# Altium PCB CH340K6T-R0.PcbDoc
Units mil, origin at the board's own origin, x right, y up, seen from the top; angles counter-clockwise.
Board outline 614 x 923 mil, 2 copper layers (Top Layer, Bottom Layer); 11 components, 14 nets, 44 pads, 50 vias.
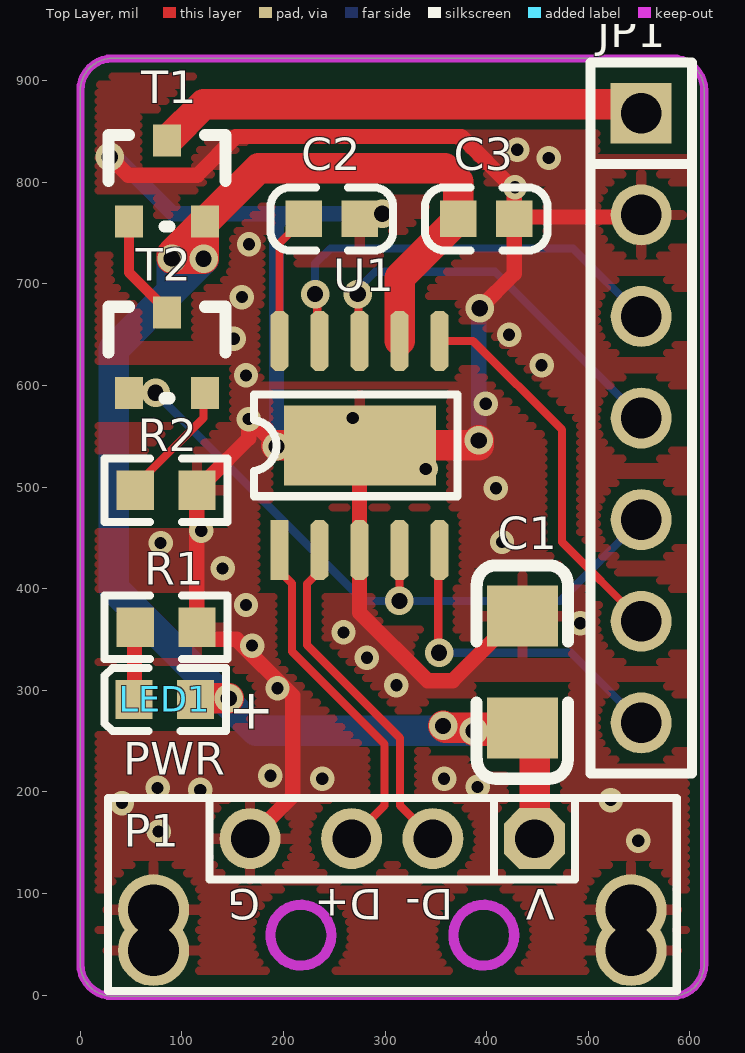
[diagram p0: Top Layer view]
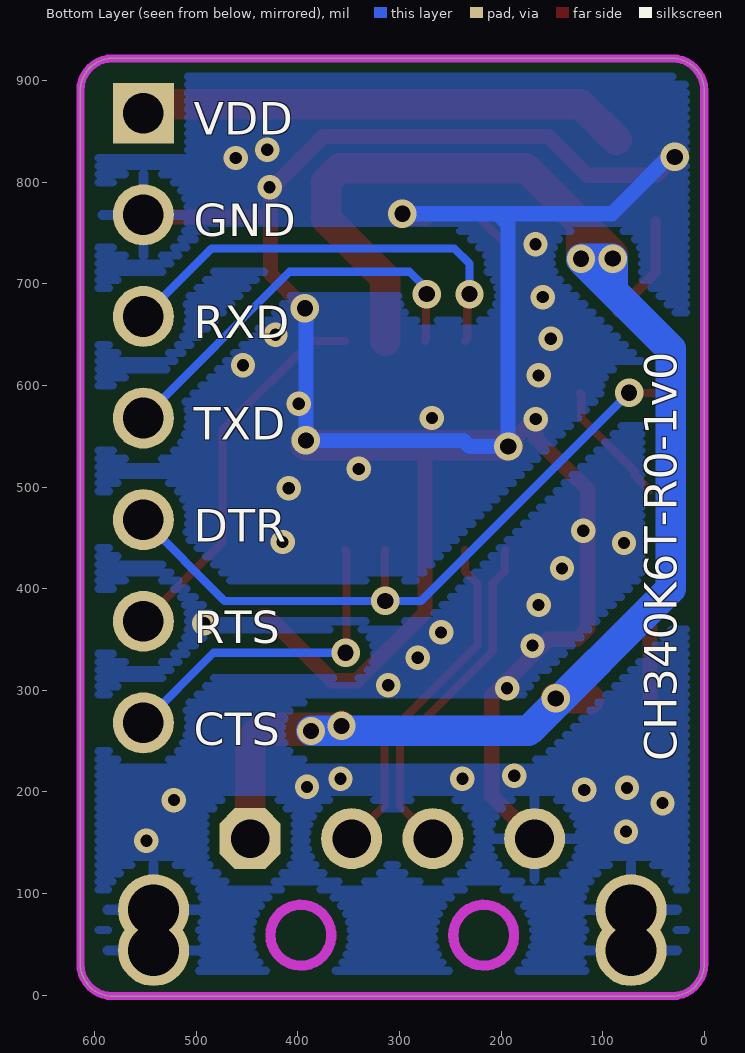
[diagram p1: Bottom Layer view, seen from below]

## Layer stack, top to bottom
Top Solder: solder mask 0.4, Solder Resist, Dk 3.5
Top Layer: signal copper 1.4
Dielectric 1: dielectric 12.6, FR-4, Dk 4.8
Bottom Layer: signal copper 1.4
Bottom Solder: solder mask 0.4, Solder Resist, Dk 3.5

## Board outline
0,30.5 0,890.5 cw(c31.5,890.5) 31.5,922 582.5,922 cw(c582.5,890.5) 614,890.5 614,30.5 cw(c582.5,30.5) 582.5,-1 31.5,-1 cw(c31.5,30.5)

## Design rules (kind name [scope] priority, off if disabled: settings)
Clearance Clearance_1 [InPolygon] p1: gap=10 ignorepadtopadclearanceinfootprint=FALSE
Clearance [All] p2: gap=6 ignorepadtopadclearanceinfootprint=FALSE
ComponentClearance [All] p1 off: gap=10 collisioncheckmode=3 verticalgap=10 showdistances=FALSE
DiffPairsRouting [All] p1: maxlimit=10 minlimit=7 mostfreqgap=8 toplayer_minwidth=6 toplayer_maxwidth=15 toplayer_prefwidth=8 bottomlayer_minwidth=6 bottomlayer_maxwidth=15 bottomlayer_prefwidth=8 maxuncoupledlength=500
MinimumSolderMaskSliver [All] p1 off: minsoldermaskwidth=10
PolygonConnect PolygonConnect_1 [IsVia] p1: connectstyle=Direct reliefconductorwidth=10 reliefentries=4 polygonreliefangle="90 Angle" airgapwidth=10
PolygonConnect [All] p2: connectstyle=Relief reliefconductorwidth=10 reliefentries=4 polygonreliefangle="90 Angle" airgapwidth=10
RoutingVias [All] p1: holewidth=16 width=28 viastyle="Through Hole" minholewidth=12 minwidth=24 maxholewidth=28 maxwidth=50
SilkToSilkClearance [All] p1 off: silktosilkclearance=10
SilkToSolderMaskClearance [IsPad] p1 off: minsilkscreentomaskgap=10 clearancetoexposedcopper=TRUE
SolderMaskExpansion [All] p1: expansion=4 istentingtop=FALSE
Width [All] p1: maxlimit=100 minlimit=6 preferedwidth=10
25 further rules are at their usual default settings.

## Classes and differential pairs
differential pair NewDifferentialPair1: +UD+ -UD-

## Components (designator, comment, footprint, x,y, rotation, side; value= is the part's Value field where it differs from the comment)
C1 "10uF" 3216_C 435,263 r270 top
C2 "0.1uF" 0603_C 220,764 r0 top
C3 "0.1uF" 0603_C 372,764 r0 top
JP1 "Header 7" SIP7-2.54mm 552,868 r0 top
LED1 "PWR" 0603+ 113.25,291 r180 top
P1 "USB" USBAM 447,154 r180 top
R1 "2K" 0603 54,362 r0 top
R2 "2K" 0603 114.63,497 r180 top
T1 "8550" SOT-23 47.69,761.47 r0 top
T2 "9013" SOT-23 47.69,592.47 r0 top
U1 "CH340K" ESSOP10 196,438 r0 top

## Footprints (in the part's own frame and the unit in brackets; to place one, negate y for a bottom-side part, rotate by r counter-clockwise, add the part's x,y. Pads: shape width x height; smd on the part's side, far side on the other; paste and mask are expansions set on the pad)
0603 [mm]
  rect 0.93x0.98 smd: 1(0,0) 2(1.54,0)
  silkscreen extent -0.76,-0.79 2.3,0.79
0603+ [mm]
  rect 0.93x0.98 smd: 1(0,0) 2(1.54,0)
  silkscreen extent -0.76,-0.79 2.27,0.79
0603_C [mil]
  rect 36x36 smd: 1(0,0) 2(55,0)
  silkscreen extent -33,-31 88,31
3216_C [mil]
  rect 60x70 smd: 1(0,0) 2(-110,0)
  silkscreen extent -160,-45 50,45
ESSOP10 [mm]
  rect 3.8x2 smd: 0(2.007,2.616)
  rect 0.45x1.5 smd: 1(0,0)
  oct 0.45x1.5 smd: 2(1,0) 3(2,0) 4(3,0) 5(4,0) 6(4,5.232) 7(3,5.232) 8(2,5.232) 9(1,5.232) 10(0,5.232)
  silkscreen extent -0.64,1.35 4.44,3.89
SIP7-2.54mm [mil]
  rect 60x60 hole 40: 1(0,0)
  round 60 hole 40: 2(0,-100) 3(0,-200) 4(0,-300) 5(0,-400) 6(0,-500) 7(0,-600)
  silkscreen extent -50,-650 50,50
SOT-23 [mm]
  rect 0.7x0.8 smd: 1(0,0) 2(1.9,0) 3(0.95,2.02)
  silkscreen extent -0.51,-0.13 2.41,2.16
USBAM [mil]
  round 70 hole 50: 0(-95,70) 0(-95,110) 0(375,70) 0(375,110)
  oct 60x60 hole 38: 1(0,0)
  round 60 hole 38: 2(100,0) 3(180,0) 4(280,0)
  Keep-Out Layer circle w10: c50,95 r30
  Keep-Out Layer circle w10: c230,95 r30
  silkscreen extent -140,-40 420,150

## Part data
C1 C2 C3: library part CAP, "Capacitor"
JP1: "Header, 7-Pin", LatestRevisionDate=17-Jul-2002, LatestRevisionNote="Re-released for DXP Platform.", Publisher="Altium Limited"
LED1: library part LED2, "Typical RED, GREEN, YELLOW, AMBER GaAs LED"
R1 R2: library part Res2, "Resistor"
T1: library part PNP, "PNP Bipolar Transistor"
T2: library part NPN, "NPN Bipolar Transistor"
U1: "USB to TTL Serial / UART for dual power"

## Via types
v1: diameter 24, hole 12, Top Layer to Bottom Layer, 35 vias
v2: diameter 28, hole 16, Top Layer to Bottom Layer, 15 vias

## Nets (pads, with @x,y where several pads share a name; then routed paths per layer and width w, separated by ;. In a path a pad name is that pad's centre, name@x,y a point inside that pad or via, vN(x,y) a via of type N, cw(c..) or ccw(c..) an arc to the next point about the centre after c; other vN are vias at no path point)
CTS: JP1.7 U1.5 | length 329.4
  Top Layer w8: v2(353,337) 352.24,337.76 352.24,436.76 U1.5
  Bottom Layer w8: v2(353,337) 483,337 JP1.7
DTR: JP1.5 T2.1 U1.4 | length 672.5
  Top Layer w8: T2.1 48.01,592.8 v2(74,592.8) ; v2(314,388) 314.06,388.06 314.06,437.94 U1.4
  Bottom Layer w8: v2(74,592.8) 278.8,388 472,388 JP1.5
GND: C1.2 C2.2 C3.2 JP1.2 P1.0 P1.4 R1.2 R2.1 U1.0 U1.3 | length 2722
  Top Layer w15: v2(29,825) 47,807 115,807 153,845 375,845 427,793 C3.2 ; P1.4 209,196 209,295 153.79,350.21 125.44,350.21 114.63,361.02 R2.1 114.63,497.98 125.44,508.79 126.42,508.79 165.75,548.12 v1(165.75,567) 167,567 193,541 v2(193,540) ; U1.0 274.74,540.74 U1.3 274.74,376.37 341.61,309.5 366.5,309.5 430,373 C1.2 ; C2.2 276,765 300.5,765 300.5,769 v2(297,769) ; v2(392,546) v2@394,546 ; v2(393,676) 427,710 C3.2 ; JP1.2 550,766 429,766 C3.2
  Top Layer w30: v2@193,541 U1.0 392,541 v2(392,546)
  Bottom Layer w15: v2(29,825) 35,825 91,769 203,769 ; v2(297,769) 203,769 ; v2(393,676) 392,675 v2(392,546) 237,546 231,540 v2(193,540) 193,759 203,769
  other v1: 549,152 77,161 41,189 522,192 118,202 76,204 391,205 238,213 358,213 187,216 194,302 311,305 282,332 169,344 259,357 492,366 163,384 140,420 79,445 415,446 119,457 409,499 340,518 268,568 399,582 163,610 454,620 151,646 422,650 159,687 166,739 427.74,795.1 461,824 430,832
NetC2_1: C2.1 U1.10 | length 129.9
  Top Layer w8: U1.10 196,740 C2.1
NetLED1_2: LED1.2 R1.1 | length 71.6
  Top Layer w15: LED1.2 53.31,291.69 53.31,361.31 R1.1
NetR2_2: R2.2 T2.2 | length 123.8
  Top Layer w8: R2.2 68.31,511.31 68.31,515.31 121,568 121,590.98 T2.2
NetT1_1: T1.1 T2.3 | length 105
  Top Layer w10: T1.1 47.69,711.37 85.09,673.97 T2.3
RTS: JP1.6 U1.6 | length 377.6
  Top Layer w8: U1.6 386.54,644 474,556.54 474,446 JP1.6
RXD: JP1.3 U1.9 | length 432.8
  Top Layer w8: v2(231,690) 233.19,687.81 233.19,646.18 U1.9
  Bottom Layer w8: v2(231,690) 231,720 246,735 485,735 JP1.3
TXD: JP1.4 U1.8 | length 397.4
  Top Layer w8: v2(273,690) 273.87,689.13 273.87,644.87 U1.8
  Bottom Layer w8: v2(273,690) 273,695 290,712 408,712 JP1.4
UD+: P1.3 U1.1 | length 340.3
  Top Layer w8: U1.1 196,417.33 208.19,405.15 208.19,338.31 299.5,247 299.5,186.5 P1.3
UD-: P1.2 U1.2 | length 340.3
  Top Layer w8: U1.2 235.37,417.1 223.19,404.91 223.19,344.53 314.5,253.21 314.5,186.5 P1.2
VCC: C1.1 C3.1 LED1.1 P1.1 T1.2 U1.7 | length 1687
  Top Layer w30: LED1.1 114.25,292 v2(146,292) ; U1.7 314.11,706.11 C3.1 372,800.82 358.82,814 175.49,814 122.96,761.47 T1.2 122.02,761.47 T1.2@121.27,760.72 ; v2(357,265) 359,263 C1.1 ; v2(387,260) 432,260 C1.1 ; P1.1 447,251 C1.1 ; T1.2@121.27,760.72 90,729.46 v2(90,725) 90.27,724.73 v2(121.27,724.73) T1.2@121.27,760.72
  Bottom Layer w30: v2(387,260) 173,260 33,400 33,636 90,693 ; 90,693 121.27,724.27 v2(121.27,724.73) 121,725 v2(90,725) 90,693
VDD: JP1.1 T1.3 | length 484
  Top Layer w30: T1.3@86.31,841.75 121.56,877 543,877 JP1.1

## Polygon pours and split planes (outlines as drawn)
GND on Top Layer "GND_L" (hatched Horizontal grid 8 track 8, remove dead copper, pour order 0): -5,928 -5,-1 614,-1 614,928
GND on Bottom Layer "GND_L" (hatched Horizontal grid 8 track 8, remove dead copper, pour order 1): -5,928 -5,-14 613,-14 613,927

## Keep-outs
Keep-Out Layer:
  the board outline again, w8

## Silkscreen, mask and mechanical layers (free items; w line width, h text height)
Bottom Overlay:
  text "VDD" at 502.46,847 h32
  text "GND" at 502.46,746.83 h32
  text "RXD" at 502.46,646.67 h32
  text "TXD" at 502.46,546.5 h32
  text "DTR" at 502.46,446.33 h32
  text "RTS" at 502.46,346.17 h32
  text "CTS" at 502.46,246 h32
  text "CH340K6T-R0-1v0" at 27,230 h32 r270
Mechanical 1:
  the board outline again, w8

## Text inside footprints (layer, text, board x,y; h text height)
LED1: Top Overlay "+" at 151.33,301.99 h40 r270
P1: Top Overlay "D-" at 367,104 h30 r180; Top Overlay "D+" at 297,104 h30 r180; Top Overlay "V" at 467,104 h30 r180; Top Overlay "G" at 177,104 h30 r180